# Altium PCB SoporokoHost.PcbDoc
Units mm, origin at the board's own origin, x right, y up, seen from the top; angles counter-clockwise.
Board outline 127 x 101.6 mm, 2 copper layers (Top Layer, Bottom Layer); 57 components, 117 nets, 388 pads, 0 vias.
Unrouted connection lines stored in the file: 257.
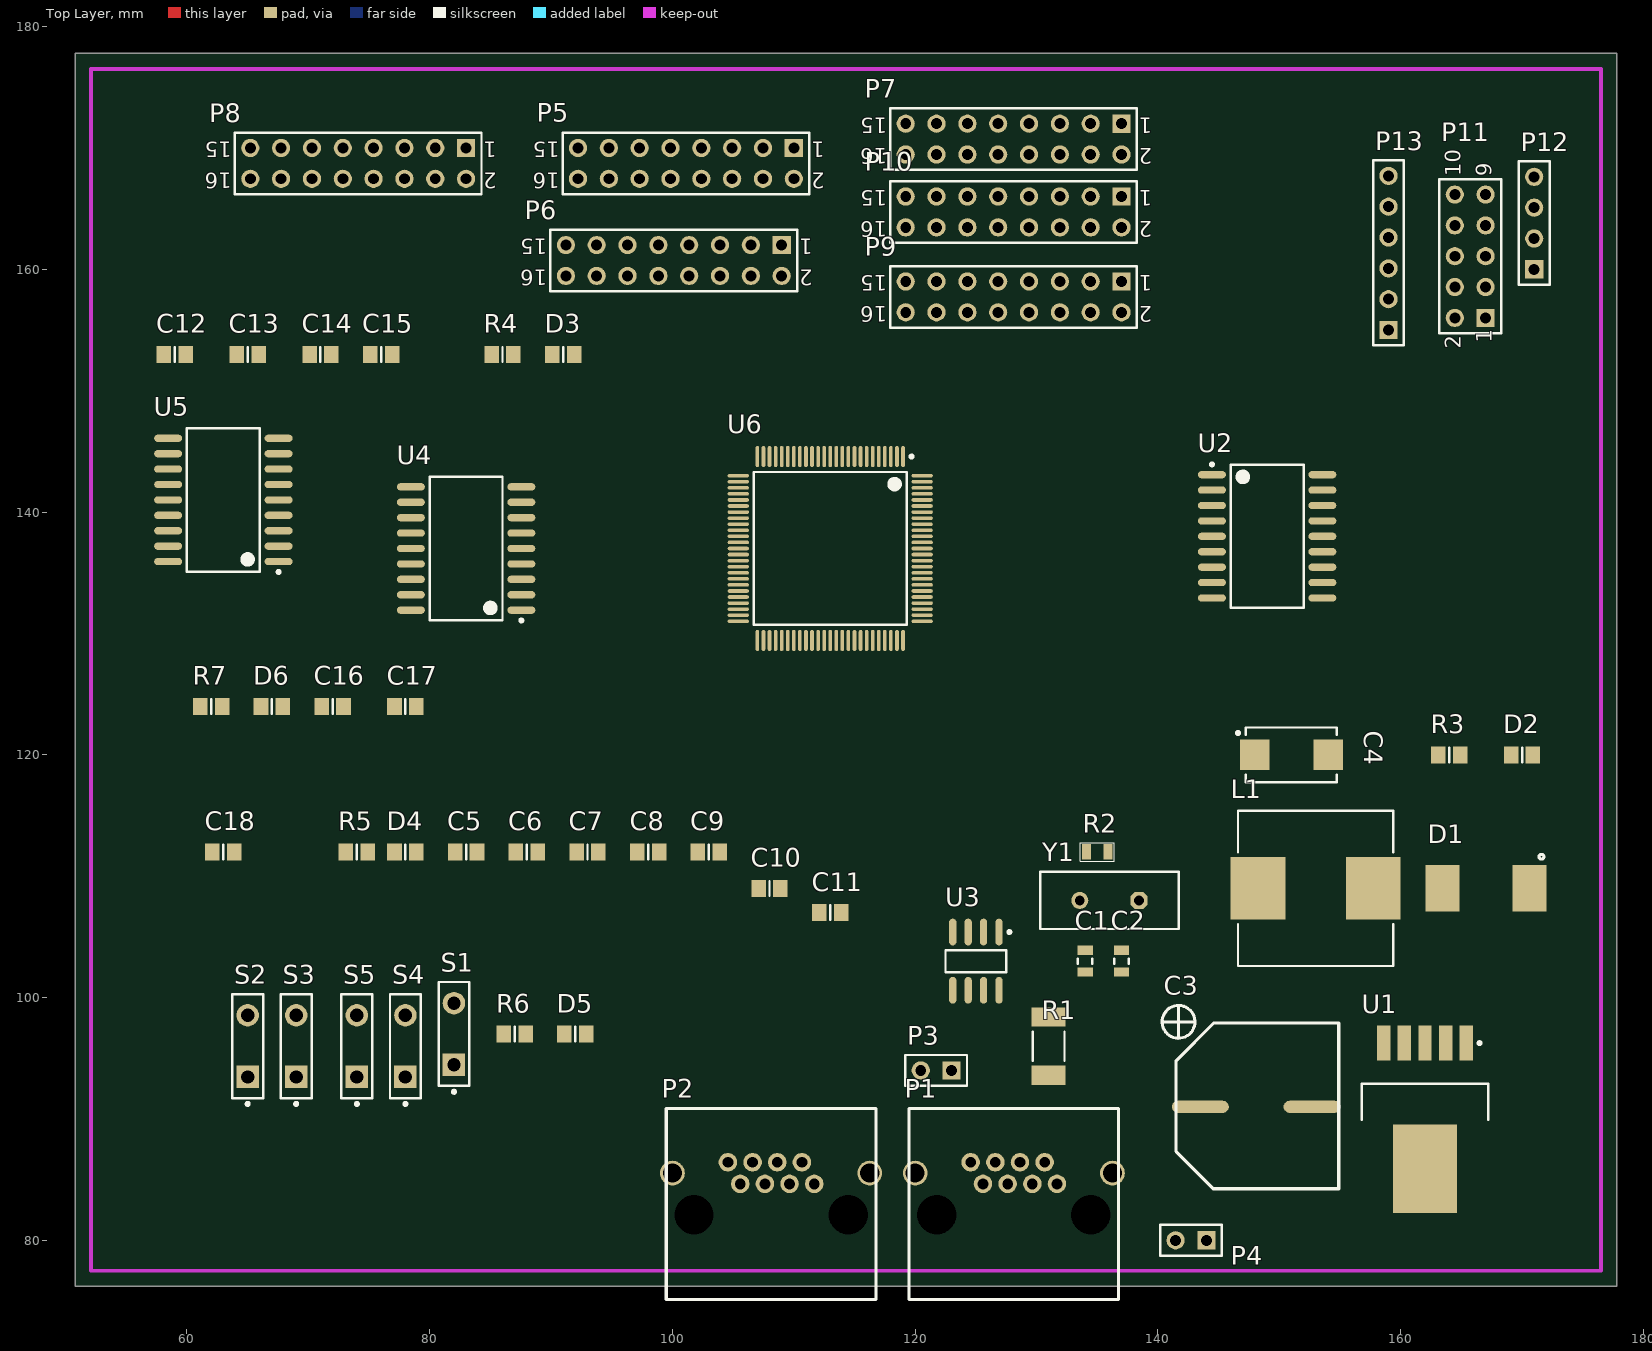
[diagram p0: Top Layer view]
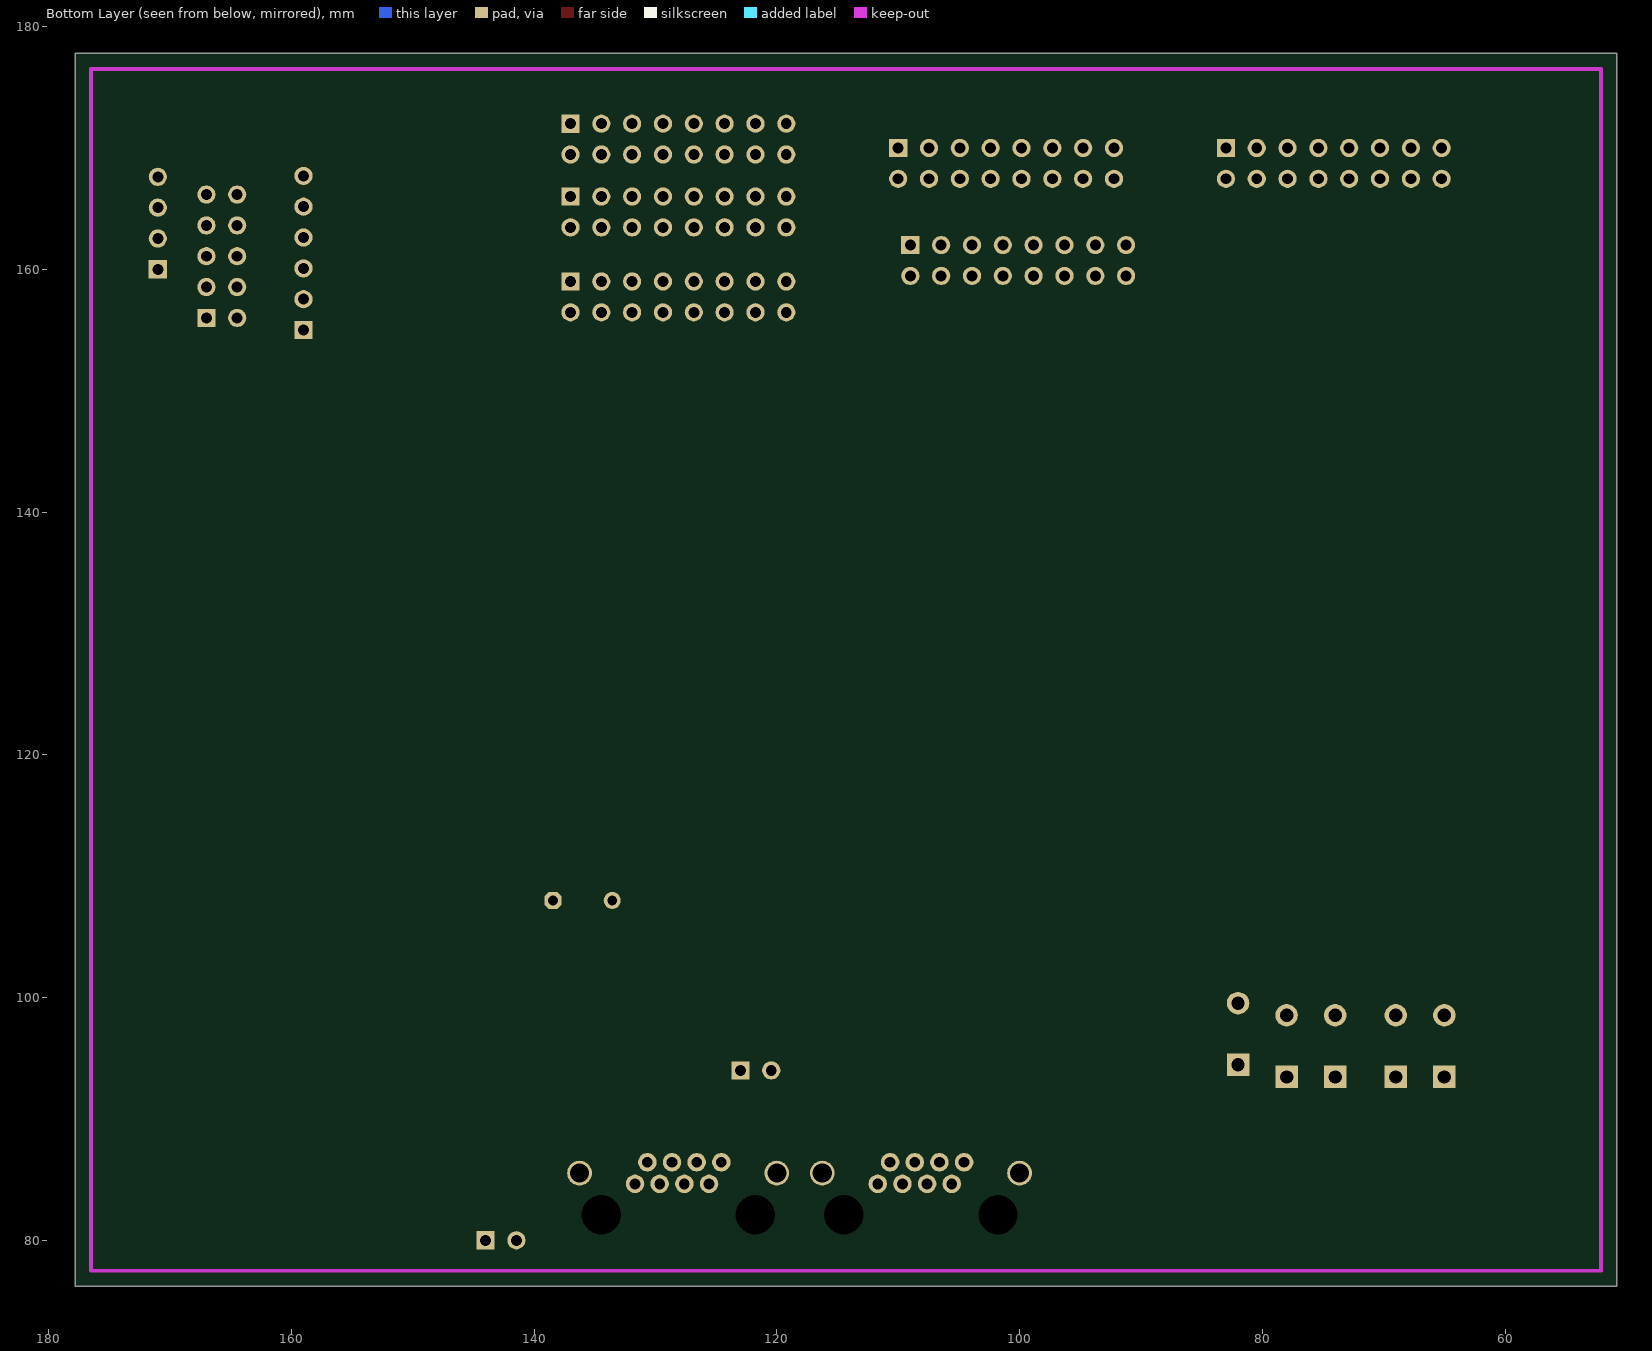
[diagram p1: Bottom Layer view, seen from below]

## Layer stack, top to bottom
Top Layer: signal copper 0.0356
Dielectric: dielectric 0.32, FR-4, Dk 4.8
Bottom Layer: signal copper 0.0356

## Board outline
50.8,76.2 177.8,76.2 177.8,177.8 50.8,177.8

## Design rules (kind name [scope] priority, off if disabled: settings)
Clearance [All] p1: gap=0.2
PolygonConnect [All] p1: connectstyle=Relief reliefconductorwidth=0.254 reliefentries=4 polygonreliefangle="90 Angle" airgapwidth=0.254
RoutingVias [All] p1: holewidth=0.6 width=1 viastyle="Through Hole" minholewidth=0.711 minwidth=1.27 maxholewidth=0.711 maxwidth=1.27
SolderMaskExpansion [All] p1: expansion=0.102
Width [All] p1: maxlimit=0.2 minlimit=0.2 preferedwidth=0.2
28 further rules are at their usual default settings.

## Components (designator, comment, footprint, x,y, rotation, side; value= is the part's Value field where it differs from the comment)
C1 "Cap" 0805_C 134,103 r270 top
C2 "Cap" 0805_C 137,103 r90 top
C3 "Cap Pol2" CAP-H13 146,91 r270 top
C4 "Cap Pol2" CAPMP7343X43N 151,120 r0 top
C5 "Cap" 6-0805_N 83,112 r0 top
C6 "Cap" 6-0805_N 88,112 r0 top
C7 "Cap" 6-0805_N 93,112 r0 top
C8 "Cap" 6-0805_N 98,112 r0 top
C9 "Cap" 6-0805_N 103,112 r0 top
C10 "Cap" 6-0805_N 108,109 r0 top
C11 "Cap" 6-0805_N 113,107 r0 top
C12 "Cap" 6-0805_N 59,153 r0 top
C13 "Cap" 6-0805_N 65,153 r0 top
C14 "Cap" 6-0805_N 71,153 r0 top
C15 "Cap" 6-0805_N 76,153 r0 top
C16 "Cap" 6-0805_N 72,124 r0 top
C17 "Cap" 6-0805_N 78,124 r0 top
C18 "Cap" 6-0805_N 63,112 r0 top
D1 "MURS320T3G" DIODE_CASE403 167,109 r180 top
D2 "LED3" 6-0805_N 170,120 r180 top
D3 "LED3" 6-0805_N 91,153 r0 top
D4 "LED3" 6-0805_N 78,112 r0 top
D5 "LED3" 6-0805_N 92,97 r0 top
D6 "LED3" 6-0805_N 67,124 r0 top
L1 "Inductor" INDP125125X80N 153,109 r180 top
P1 "RJ45-CAN" RJ45-CAN 128,83 r0 top
P2 "RJ45-CAN" RJ45-CAN 108,83 r0 top
P3 "CAN_TERM_JMP" HDR1X2 123,94 r180 top
P4 "PWR_IN" HDR1X2 144,80 r180 top
P5 "Header 8X2" HDR2X8 110,170 r180 top
P6 "Header 8X2" HDR2X8 109,162 r180 top
P7 "Header 8X2" HDR2X8 137,172 r180 top
P8 "Header 8X2" HDR2X8 83,170 r180 top
P9 "Header 8X2" HDR2X8 137,159 r180 top
P10 "Header 8X2" HDR2X8 137,166 r180 top
P11 "Header 5X2" HDR2X5 167,156 r90 top
P12 "Header 4" HDR1X4 171,160 r90 top
P13 "Header 6" HDR1X6 159,155 r90 top
R1 "Res" RESC5025M 131,96 r90 top
R2 "Res2" 0805_R 135,112 r0 top
R3 "Res2" 6-0805_N 164,120 r0 top
R4 "Res2" 6-0805_N 86,153 r0 top
R5 "Res2" 6-0805_N 74,112 r0 top
R6 "Res2" 6-0805_N 87,97 r0 top
R7 "Res2" 6-0805_N 62,124 r0 top
S1 "SW-PB" SPST-2 82,97 r90 top
S2 "SW-PB" SPST-2 65,96 r90 top
S3 "SW-PB" SPST-2 69,96 r90 top
S4 "SW-PB" SPST-2 78,96 r90 top
S5 "SW-PB" SPST-2 74,96 r90 top
U1 "LM2596-3.3" DPAK170P1435X465-6N 162,90 r270 top
U2 "ULN2803ADWR" SOIC127P1030X265-18N 149,138 r0 top
U3 "SN65HVD230DR" SOIC127P600X175-8N 125,103 r270 top
U4 "ULN2803ADWR" SOIC127P1030X265-18N 83,137 r180 top
U5 "ULN2803ADWR" SOIC127P1030X265-18N 63,141 r180 top
U6 "STM32F407" TSQFP50P1600X1600X160-100N 113,137 r270 top
Y1 "8MHz" HC-49U 136,108 r180 top

## Footprints (in the part's own frame and the unit in brackets; to place one, negate y for a bottom-side part, rotate by r counter-clockwise, add the part's x,y. Pads: shape width x height; smd on the part's side, far side on the other; paste and mask are expansions set on the pad)
6-0805_N [mm] "Chip Resistor, Body 2.0x1.2mm, IPC Medium Density"
  rect 1.2x1.4 smd: 1(-0.9,0) 2(0.9,0)
  silkscreen extent 0,-0.6 0,0.6, body extent -1.07,-0.7 1.07,0.7, height 0.7
0805_C [mil]
  rect 30x50 smd: 1(-35,0) 2(35,0)
  silkscreen extent -8,-24 8,24, body extent -39,-24 39,24, height 22
0805_R [mil]
  rect 30x50 smd: 1(-35,0) 2(35,0)
  silkscreen extent -55,-30 55,30
CAP-H13 [mm]
  oval 1x4.7 smd: 1(0,-2.5) 2(0,6.7)
  silkscreen extent -8.35,-5.65 6.75,8.9
CAPMP7343X43N [mm] "Molded Capacitor, 2-Leads, Body 7.30x4.30mm, IPC Medium Density"
  rect 2.45x2.5 smd: 1(-3.025,0) 2(3.025,0)
  silkscreen extent -4.52,-2.25 3.75,2.25, body extent -3.75,-2.25 3.75,2.25, height 4.3
DIODE_CASE403 [mil]
  rect 110x150 smd: 1(-141.73,0) 2(139.25,0)
  silkscreen extent -189,-110 -173,-94
DPAK170P1435X465-6N [mm] "D2-PAK, 6-Pads, Body 7.55x8.56mm (max), IPC Medium Density"
  rect 2.9x1.1 smd: 1(-6.25,3.4) 2(-6.25,1.7) 3(-6.25,0) 4(-6.25,-1.7) 5(-6.25,-3.4)
  rect 7.3x5.3 smd: 6(4.1,0)
  silkscreen extent -6.37,-5.2 0.05,5.2, body extent -2.9,-5.2 5.99,5.2, height 4.65
HC-49U [mm] "Quartz Crystal, Thru-Hole; 2 Leads; Body 11.35 x 4.65 x 13.46 mm (LxWxH max)"
  oct 1.4x1.4 hole 0.8: 1(-2.44,0)
  round 1.4 hole 0.8: 2(2.44,0)
  silkscreen extent -5.7,-2.35 5.7,2.35
HDR1X2 [mm] "Connector; Header; 2 Position"
  rect 1.5x1.5 hole 0.9: 1(0,0)
  round 1.5 hole 0.9: 2(2.54,0)
  silkscreen extent -1.27,-1.27 3.81,1.27
HDR1X4 [mm] "Connector; Header; 4 Position"
  rect 1.5x1.5 hole 0.9: 1(0,0)
  round 1.5 hole 0.9: 2(2.54,0) 3(5.08,0) 4(7.62,0)
  silkscreen extent -1.27,-1.27 8.89,1.27
HDR1X6 [mm] "Connector; Header; 6 Position"
  rect 1.5x1.5 hole 0.9: 1(0,0)
  round 1.5 hole 0.9: 2(2.54,0) 3(5.08,0) 4(7.62,0) 5(10.16,0) 6(12.7,0)
  silkscreen extent -1.27,-1.27 13.97,1.27
HDR2X5 [mm] "Connector; Header; 5x2 Position"
  rect 1.5x1.5 hole 0.9: 1(0,0)
  round 1.5 hole 0.9: 2(0,2.54) 3(2.54,0) 4(2.54,2.54) 5(5.08,0) 6(5.08,2.54) 7(7.62,0) 8(7.62,2.54) 9(10.16,0) 10(10.16,2.54)
  silkscreen extent -1.27,-1.27 11.43,3.81
HDR2X8 [mm] "Connector; Header; 8x2 Position"
  rect 1.5x1.5 hole 0.9: 1(0,0)
  round 1.5 hole 0.9: 2(0,2.54) 3(2.54,0) 4(2.54,2.54) 5(5.08,0) 6(5.08,2.54) 7(7.62,0) 8(7.62,2.54) 9(10.16,0) 10(10.16,2.54) 11(12.7,0) 12(12.7,2.54) 13(15.24,0) 14(15.24,2.54) 15(17.78,0) 16(17.78,2.54)
  silkscreen extent -1.27,-1.27 19.05,3.81
INDP125125X80N [mm] "Precision Wire Wound Inductor, 2-Leads, Body 12.50x12.50mm, IPC Medium Density"
  rect 4.5x5.15 smd: 1(-4.75,0) 2(4.75,0)
  silkscreen extent -6.4,-6.4 6.4,6.4, body extent -6.4,-6.4 6.4,6.4, height 8
RESC5025M [mm] "Chip Resistor, Body 5.0x2.5mm, IPC Low Density"
  rect 1.6x2.8 smd: 1(-2.4,0) 2(2.4,0)
  silkscreen extent -1.2,-1.3 1.2,1.3, body extent -2.58,-1.33 2.58,1.33, height 0.71
RJ45-CAN [mil]
  round 60 hole 35: 1(145,65) 2(105,135) 3(65,65) 4(25,135) 5(-15,65) 6(-55,135) 7(-95,65) 8(-135,135)
  round 80 hole 62: 9(-315,100) 9(325,100)
  round 0 hole 128: 10(-245,-35)
  round 0 hole 128 unplated: 10(255,-35)
  silkscreen extent -335,-310 345,310
SOIC127P600X175-8N [mm] "SOIC, 8-Leads, Body 4.90x3.90mm, Pitch 1.27mm, IPC Medium Density"
  oval 2.2x0.6 smd: 1(-2.4,1.905) 2(-2.4,0.635) 3(-2.4,-0.635) 4(-2.4,-1.905) 5(2.4,-1.905) 6(2.4,-0.635) 7(2.4,0.635) 8(2.4,1.905)
  silkscreen extent -2.52,-2.5 0.9,2.88, body extent -2,-2.5 2,2.5, height 1.75
SOIC127P1030X265-18N [mm] "SOIC, 18-Leads, Body 11.55x7.50mm, Pitch 1.27mm, IPC Medium Density"
  oval 2.3x0.6 smd: 1(-4.55,5.08) 2(-4.55,3.81) 3(-4.55,2.54) 4(-4.55,1.27) 5(-4.55,0) 6(-4.55,-1.27) 7(-4.55,-2.54) 8(-4.55,-3.81) 9(-4.55,-5.08) 10(4.55,-5.08) 11(4.55,-3.81) 12(4.55,-2.54) 13(4.55,-1.27) 14(4.55,0) 15(4.55,1.27) 16(4.55,2.54) 17(4.55,3.81) 18(4.55,5.08)
  silkscreen extent -4.67,-5.9 3,6.05, body extent -3.8,-5.9 3.8,5.9, height 2.65
SPST-2 [mm] "Switch; 2 Leads"
  rect 1.85x1.85 hole 1.1: 1(-2.54,0)
  round 1.85 hole 1.1: 2(2.54,0)
  silkscreen extent -4.89,-1.27 4.28,1.27
TSQFP50P1600X1600X160-100N [mm] "TSQFP, 100-Leads, Body 14.00x14.00mm, Pitch 0.50mm, IPC Medium Density"
  oval 1.75x0.3 smd: 1(-7.575,6) 2(-7.575,5.5) 3(-7.575,5) 4(-7.575,4.5) 5(-7.575,4) 6(-7.575,3.5) 7(-7.575,3) 8(-7.575,2.5) 9(-7.575,2) 10(-7.575,1.5) 11(-7.575,1) 12(-7.575,0.5) 13(-7.575,0) 14(-7.575,-0.5) 15(-7.575,-1) 16(-7.575,-1.5) 17(-7.575,-2) 18(-7.575,-2.5) 19(-7.575,-3) 20(-7.575,-3.5) 21(-7.575,-4) 22(-7.575,-4.5) 23(-7.575,-5) 24(-7.575,-5.5) 25(-7.575,-6) 51(7.575,-6) 52(7.575,-5.5) 53(7.575,-5) 54(7.575,-4.5) 55(7.575,-4) 56(7.575,-3.5) 57(7.575,-3) 58(7.575,-2.5) 59(7.575,-2) 60(7.575,-1.5) 61(7.575,-1) 62(7.575,-0.5) 63(7.575,0) 64(7.575,0.5) 65(7.575,1) 66(7.575,1.5) 67(7.575,2) 68(7.575,2.5) 69(7.575,3) 70(7.575,3.5) 71(7.575,4) 72(7.575,4.5) 73(7.575,5) 74(7.575,5.5) 75(7.575,6)
  oval 0.3x1.75 smd: 26(-6,-7.575) 27(-5.5,-7.575) 28(-5,-7.575) 29(-4.5,-7.575) 30(-4,-7.575) 31(-3.5,-7.575) 32(-3,-7.575) 33(-2.5,-7.575) 34(-2,-7.575) 35(-1.5,-7.575) 36(-1,-7.575) 37(-0.5,-7.575) 38(0,-7.575) 39(0.5,-7.575) 40(1,-7.575) 41(1.5,-7.575) 42(2,-7.575) 43(2.5,-7.575) 44(3,-7.575) 45(3.5,-7.575) 46(4,-7.575) 47(4.5,-7.575) 48(5,-7.575) 49(5.5,-7.575) 50(6,-7.575) 76(6,7.575) 77(5.5,7.575) 78(5,7.575) 79(4.5,7.575) 80(4,7.575) 81(3.5,7.575) 82(3,7.575) 83(2.5,7.575) 84(2,7.575) 85(1.5,7.575) 86(1,7.575) 87(0.5,7.575) 88(0,7.575) 89(-0.5,7.575) 90(-1,7.575) 91(-1.5,7.575) 92(-2,7.575) 93(-2.5,7.575) 94(-3,7.575) 95(-3.5,7.575) 96(-4,7.575) 97(-4.5,7.575) 98(-5,7.575) 99(-5.5,7.575) 100(-6,7.575)
  silkscreen extent -7.7,-6.3 6.3,6.83, body extent -7,-7 7,7, height 1.6

## Part data
C1 C2 C5 C6 C7 C8 C9 C10 C11 C12 C13 C14 C15 C16 C17 C18: "Capacitor"
C3 C4: "Polarized Capacitor (Axial)"
D1: library part "D Schottky"
D2 D3 D4 D5 D6: "Typical BLUE SiC LED"
P3 P4: library part "Header 2", "Header, 2-Pin"
P5 P6 P7 P8 P9 P10: "Header, 8-Pin, Dual row"
P11: "Header, 5-Pin, Dual row"
P12: "Header, 4-Pin"
P13: "Header, 6-Pin"
R1: library part Res2, "Resistor"
R2 R3 R4 R5 R6 R7: "Resistor"
S1 S2 S3 S4 S5: "Switch"
Y1: library part XTAL, "Crystal Oscillator"

## Nets (pads, with @x,y where several pads share a name; then routed paths per layer and width w, separated by ;. In a path a pad name is that pad's centre, name@x,y a point inside that pad or via, vN(x,y) a via of type N, cw(c..) or ccw(c..) an arc to the next point about the centre after c; other vN are vias at no path point)
2: P1.1 P2.1
3: U1.6
4: P1.3 P2.3
6: P1.5 P2.5
8: P1.7 P1.9 P2.7 P2.9
B0: P11.3 S2.1 U6.51
B1: P11.5 S3.1 U6.52
B2: P11.7 S4.1 U6.53
B3: P11.9 S5.1 U6.54
BOOT0: C1.2 C2.1 C3.2 C4.1 C4.2 C5.1 C6.1 C7.1 C8.1 C8.2 C9.1 C9.2 C10.1 C10.2 C11.1 C11.2 C12.1 C12.2 C13.1 C13.2 C14.1 C14.2 C15.1 C15.2 C16.1 C16.2 C17.1 C17.2 C18.1 C18.2 D1.1 D2.1 L1.2 P1.8 P2.8 P4.1 P6.2 P6.4 P6.6 P6.8 P6.10 P6.12 P6.14 P6.16 P8.2 P8.4 P8.6 P8.8 P8.10 P8.12 P8.14 P8.16 P10.2 P10.4 P10.6 P10.8 P10.10 P10.12 P10.14 P10.16 P11.2 P11.4 P11.6 P11.8 P11.10 P12.1 P12.4 P13.1 P13.3 R3.1 R4.2 R5.2 R6.2 R7.2 S1.2 S2.2 S3.2 S4.2 S5.2 U1.3 U1.4 U1.5 U2.9 U3.2 U3.3 U3.8 U4.9 U5.9 U6.6 U6.10 U6.11 U6.19 U6.20 U6.21 U6.22 U6.27 U6.28 U6.50 U6.74 U6.75 U6.94 U6.99 U6.100
CAN1_RX: U3.4 U6.95
CAN1_TX: U3.1 U6.96
CANH: P1.6 P2.6 R1.1 U3.7
CANL: P1.4 P2.4 P3.1 U3.6
D0: D3.1 U6.35
D1: D4.1 U6.36
D2: D5.1 U6.37
D3: D6.1 U6.90
LD0: U6.23
LD1: U6.24
LD2: U6.25
LD3: U6.26
LD4: U6.29
LD5: U6.30
LD6: U6.31
LD7: U6.32
NetC2_2: C2.2 R2.2 Y1.1
NetD1_2: D1.2 L1.1 U1.2
NetD2_2: D2.2 R3.2
NetD3_2: D3.2 R4.1
NetD4_2: D4.2 R5.1
NetD5_2: D5.2 R6.1
NetD6_2: D6.2 R7.1
NetP3_2: P3.2 R1.2
NRST: C5.2 P11.1 P13.5 S1.1 U6.14
OSC_IN: C1.1 U6.12 Y1.2
OSC_OUT: R2.1 U6.13
PWR: C3.1 P1.2 P2.2 P4.2 P5.2 P5.4 P5.6 P5.8 P5.10 P5.12 P5.14 P5.16 P7.2 P7.4 P7.6 P7.8 P7.10 P7.12 P7.14 P7.16 P9.2 P9.4 P9.6 P9.8 P9.10 P9.12 P9.14 P9.16 U1.1 U2.10 U4.10 U5.10
R0: P5.1 U2.18
R1: P5.3 U2.17
R2: P5.5 U2.16
R3: P5.7 U2.15
R4: P5.9 U2.14
R5: P5.11 U2.13
R6: P5.13 U2.12
R7: P5.15 U2.11
R8: P7.1 U4.18
R9: P7.3 U4.17
R10: P7.5 U4.16
R11: P7.7 U4.15
R12: P7.9 U4.14
R13: P7.11 U4.13
R14: P7.13 U4.12
R15: P7.15 U4.11
R16: P9.1 U5.18
R17: P9.3 U5.17
R18: P9.5 U5.16
R19: P9.7 U5.15
R20: P9.9 U5.14
R21: P9.11 U5.13
R22: P9.13 U5.12
R23: P9.15 U5.11
S0: P6.1 U6.38
S1: P6.3 U6.5
S2: P6.5 U6.4
S3: P6.7 U6.3
S4: P6.9 U6.2
S5: P6.11 U6.1
S6: P6.13 U6.98
S7: P6.15 U6.97
S8: P8.1 U6.9
S9: P8.3 U6.8
S10: P8.5 U6.7
S11: P8.7 U6.80
S12: P8.9 U6.79
S13: P8.11 U6.78
S14: P8.13 U6.66
S15: P8.15 U6.65
S16: P10.1 U6.64
S17: P10.3 U6.63
S18: P10.5 U6.34
S19: P10.7 U6.33
S20: P10.9 U6.18
S21: P10.11 U6.17
S22: P10.13 U6.16
S23: P10.15 U6.15
SWCLK: P13.2 U6.76
SWDIO: P13.4 U6.72
TRACESWO: P13.6 U6.89
U0: U2.1 U6.81
U1: U2.2 U6.82
U2: U2.4 U6.83
U3: U2.3 U6.84
U4: U2.5 U6.85
U5: U2.6 U6.86
U6: U2.7 U6.87
U7: U2.8 U6.88
U8: U4.1 U6.55
U9: U4.2 U6.56
U10: U4.4 U6.57
U11: U4.3 U6.58
U12: U4.5 U6.59
U13: U4.6 U6.60
U14: U4.7 U6.61
U15: U4.8 U6.62
U16: U5.1 U6.39
U17: U5.2 U6.40
U18: U5.4 U6.41
U19: U5.3 U6.42
U20: U5.5 U6.43
U21: U5.6 U6.44
U22: U5.7 U6.45
U23: U5.8 U6.46
USART1_RX: P12.2 U6.93
USART1_TX: P12.3 U6.92
VCAP_1: C6.2 U6.49
VCAP_2: C7.2 U6.73
pads on no net: P1.10 P2.10 U3.5 U6.47 U6.48 U6.67 U6.68 U6.69 U6.70 U6.71 U6.77 U6.91

## Keep-outs
Keep-Out Layer:
  lines w0.3: 52.1,77.5 176.5,77.5 176.5,176.5 52.1,176.5 52.1,77.5

## Dimensions
52.1,77.5 to 176.5,77.5 on Mechanical 1
52.1,77.5 to 52.1,176.5 on Mechanical 1

## Text inside footprints (layer, text, board x,y; h text height)
P5: Top Overlay "2" at 112.54,167.968 h1.27 r180; Top Overlay "1" at 112.54,170.508 h1.27 r180; Top Overlay "15" at 90.696,170.508 h1.27 r180; Top Overlay "16" at 90.696,167.968 h1.27 r180
P6: Top Overlay "2" at 111.54,159.968 h1.27 r180; Top Overlay "1" at 111.54,162.508 h1.27 r180; Top Overlay "15" at 89.696,162.508 h1.27 r180; Top Overlay "16" at 89.696,159.968 h1.27 r180
P7: Top Overlay "2" at 139.54,169.968 h1.27 r180; Top Overlay "1" at 139.54,172.508 h1.27 r180; Top Overlay "15" at 117.696,172.508 h1.27 r180; Top Overlay "16" at 117.696,169.968 h1.27 r180
P8: Top Overlay "2" at 85.54,167.968 h1.27 r180; Top Overlay "1" at 85.54,170.508 h1.27 r180; Top Overlay "15" at 63.696,170.508 h1.27 r180; Top Overlay "16" at 63.696,167.968 h1.27 r180
P9: Top Overlay "2" at 139.54,156.968 h1.27 r180; Top Overlay "1" at 139.54,159.508 h1.27 r180; Top Overlay "15" at 117.696,159.508 h1.27 r180; Top Overlay "16" at 117.696,156.968 h1.27 r180
P10: Top Overlay "2" at 139.54,163.968 h1.27 r180; Top Overlay "1" at 139.54,166.508 h1.27 r180; Top Overlay "15" at 117.696,166.508 h1.27 r180; Top Overlay "16" at 117.696,163.968 h1.27 r180
P11: Top Overlay "10" at 164.968,167.684 h1.27 r90; Top Overlay "9" at 167.508,167.684 h1.27 r90; Top Overlay "1" at 167.508,153.968 h1.27 r90; Top Overlay "2" at 164.968,153.46 h1.27 r90